# Altium PCB DIOT_SYS_extender_card.PcbDoc (part 4 of 6)
Units mm, origin at the board's own origin, x right, y up, seen from the top; angles counter-clockwise.
Board outline 280.04 x 100 mm, 6 copper layers (Top Layer, L2GND, L3, L4, L5GND, Bottom Layer), stack 1.558 mm thick; 18 components, 344 nets, 1062 pads, 179 vias.
Unrouted connection lines stored in the file: 389.
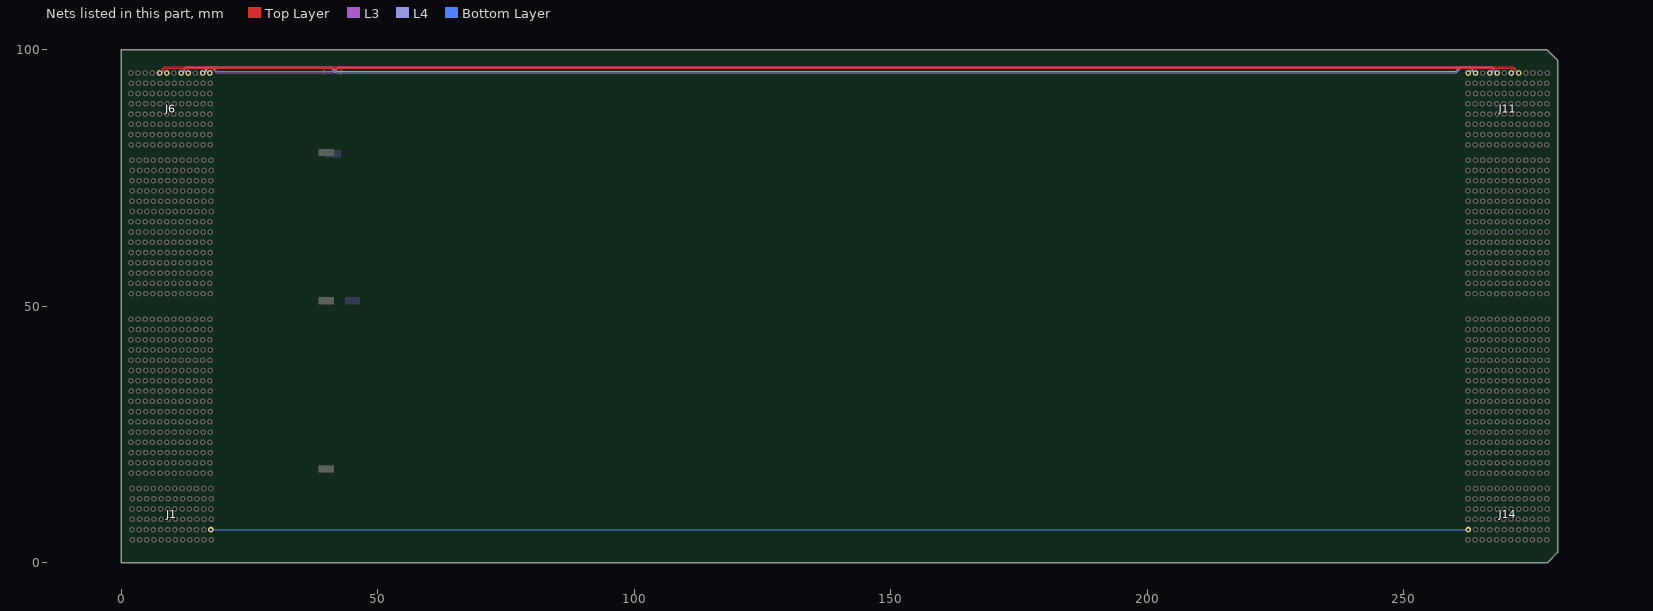
[diagram p8: the nets of this part, all layers, seen from the top]

## Via types
v1: diameter 0.4, hole 0.2, Top Layer to Bottom Layer, tented both sides, 179 vias

## Nets (pads, with @x,y where several pads share a name; then routed paths per layer and width w, separated by ;. In a path a pad name is that pad's centre, name@x,y a point inside that pad or via, vN(x,y) a via of type N, cw(c..) or ccw(c..) an arc to the next point about the centre after c; other vN are vias at no path point) (continued)
SLOT8.LVDS_12_N: J6.F8 J11.F8 | length 265.7
  Top Layer w0.11: J6.F8@8.9,95.5 8.66,95.5 8.32,95.84 8.32,96.186 8.609,96.476 55.039,96.476 271.304,96.476 271.619,96.161 271.619,95.84 271.279,95.5 J11.F8@271.039,95.5
SLOT8.LVDS_12_P: J6.E8 J11.E8 | length 266.5
  Top Layer w0.11: J6.E8@7.5,95.5 7.74,95.5 8.08,95.84 8.08,96.286 8.51,96.716 55.039,96.716 271.403,96.716 271.859,96.26 271.859,95.84 272.199,95.5 J11.E8@272.439,95.5
SLOT8.LVDS_13_N: J6.I8 J11.I8 | length 258.3
  L3 w0.085: J6.I8@13.1,95.5 12.833,95.5 12.523,95.81 12.523,96.345 12.661,96.483 17.65,96.483 18.578,95.555 39.261,95.555 39.397,95.555 39.515,95.438 v1(39.6,95.438) 39.6,95.455 39.7,95.555 41.474,95.555 42.402,96.483 267.192,96.483 267.416,96.259 267.416,95.81 267.106,95.5 J11.I8@266.839,95.5
SLOT8.LVDS_13_P: J6.H8 J11.H8 | length 259.1
  L3 w0.085: J6.H8@11.7,95.5 11.967,95.5 12.278,95.81 12.278,96.446 12.559,96.728 17.751,96.728 18.679,95.8 39.16,95.8 39.397,95.8 39.515,95.918 v1(39.6,95.918) 39.6,95.9 39.7,95.8 41.372,95.8 42.3,96.728 267.294,96.728 267.661,96.361 267.661,95.81 267.971,95.5 J11.H8@268.239,95.5
SLOT8.LVDS_14_N: J6.L8 J11.L8 | length 249.8
  L4 w0.085: J6.L8@17.3,95.5 17.033,95.5 16.723,95.81 16.723,96.206 16.976,96.459 40.951,96.459 41.855,95.555 42.7,95.555 42.8,95.455 v1(42.8,95.438) 42.885,95.438 43.003,95.555 260.245,95.555 261.149,96.459 263.056,96.459 263.216,96.299 263.216,95.81 262.906,95.5 J11.L8@262.639,95.5
SLOT8.LVDS_14_P: J6.K8 J11.K8 | length 250.6
  L4 w0.085: J6.K8@15.9,95.5 16.167,95.5 16.478,95.81 16.478,96.307 16.875,96.704 41.052,96.704 41.957,95.8 42.7,95.8 42.8,95.9 v1(42.8,95.918) 42.885,95.918 43.003,95.8 260.143,95.8 261.048,96.704 263.157,96.704 263.461,96.4 263.461,95.81 263.771,95.5 J11.K8@264.039,95.5
SYSEN_N: J1.L2 J14.L2 | length 245.1
  Bottom Layer w0.085: J1.L2@17.5,6.5 260.125,6.5 J14.L2@262.639,6.5
pads on no net: J2.A1 J2.B1 J2.B2 J2.C2 J2.D1 J2.E1 J2.E2 J2.F2 J2.G1 J2.H1 J2.H2 J2.I2 J2.J1 J2.K1 J2.K2 J2.L2 J3.A4 J3.D4 J3.G4 J3.J4 J33.A1 J33.B1 J33.B2 J33.C2 J33.D1 J33.E1 J33.E2 J33.F2 J33.G1 J33.H1 J33.H2 J33.I2 J33.J1 J33.K1 J33.K2 J33.L2

## Polygon pours and split planes (outlines as drawn)
GND on Bottom Layer "GND_L06_P209" (solid, remove dead copper, pour order 209): 262,52.7 262,46.775 279.775,46.775 279.775,52.7
no net on Bottom Layer "NONET_L06_P203" (solid, pour order 203): 277.533,1 277.55,1 278.79,2.24 60.265,2.24 60.265,1
GND on Top Layer "GND_L01_P207" (solid, remove dead copper, pour order 207): 262,52.7 262,46.775 279.775,46.775 279.775,52.7
no net on Top Layer "esd1" (solid, pour order 189): 277.533,1 277.55,1 278.79,2.24 60.25,2.24 60.25,1
P12V0 on L3 "P12V0_L03_P210" (solid, pour order 210): 1.025,5.95 1.025,2.1 278.5,2.1 278.5,5.875
P12V0 on L4 "P12V0_L04_P211" (solid, pour order 211): 1.025,5.95 1.025,2.1 278.5,2.1 278.5,5.875
GND on L5GND (split plane): 279.037,97.585 279.037,2.415 277.624,1.002 1.002,1.002 1.002,98.998 277.624,98.998
GND on L2GND (split plane): 279.037,97.585 279.037,2.415 277.624,1.002 1.002,1.002 1.002,98.998 277.624,98.998

## Keep-outs
Keep-Out Layer:
  region: 266.037,48.55 279.475,48.55 279.475,51.45 266.037,51.45

## Other copper
Top Layer:
  rectangle net SLOT1.LVDS_3_P: 39.614,10.556 39.99,10.728
  rectangle net SLOT1.LVDS_3_N: 39.69,10.863 39.99,10.976
  rectangle net SERVMOD: 34.573,8.348 34.893,8.468
  rectangle net PRST_N: 34.57,8.602 34.841,8.726
  rectangle net SHARED_BUS_3: 29.478,10.247 29.847,10.468
  rectangle net PE_CLK_N: 34.389,14.253 34.743,14.433
  rectangle net PE_CLK_P: 34.302,14.568 34.703,14.733
  rectangle net SLOT1.LVDS_9_N: 29.597,16.383 29.992,16.551
  rectangle net SLOT1.LVDS_9_P: 29.597,16.686 29.992,16.863
  rectangle net SLOT2.LVDS_9_N: 34.669,21.34 34.945,21.458
  rectangle net SLOT2.LVDS_9_P: 34.617,21.593 34.945,21.763
  rectangle net 3_DIFF_15_P: 39.651,23.787 39.911,23.905
  rectangle net P_PRES0_N: 29.597,25.81 29.88,26.03
  rectangle net F_RST: 34.593,27.593 34.854,27.71
  rectangle net M_SDA: 39.598,29.3 39.89,29.476
  rectangle net M_SCL: 39.615,29.611 39.941,29.85
  rectangle net P_RST: 29.675,31.7 29.992,31.885
  rectangle net SLOT3.LVDS_2_N: 34.572,33.183 34.893,33.342
  rectangle net SLOT3.LVDS_2_P: 34.621,33.477 34.85,33.663
  rectangle net SLOT7.LVDS_2_N: 39.5,35.183 39.99,35.338
  rectangle net SLOT7.LVDS_2_P: 39.615,35.473 39.939,35.663
  rectangle net SLOT3.LVDS_0_N: 29.474,37.16 29.921,37.342
  rectangle net SLOT3.LVDS_0_P: 29.597,37.477 29.992,37.663
  rectangle net SLOT5.LVDS_0_N: 34.617,39.183 34.998,39.348
  rectangle net SLOT5.LVDS_0_P: 34.642,39.483 34.918,39.601
  rectangle net SLOT7.LVDS_0_N: 39.661,41.266 39.89,41.389
  rectangle net SLOT7.LVDS_0_P: 39.615,41.523 39.914,41.718
  rectangle net SLOT2.LVDS_3_N: 29.597,43.229 29.88,43.399
  rectangle net SLOT2.LVDS_3_P: 29.597,43.533 29.868,43.709
  rectangle net SLOT4.LVDS_3_N: 34.669,45.288 34.998,45.408
  rectangle net SLOT4.LVDS_3_P: 34.707,45.543 34.945,45.71
  rectangle net SLOT6.LVDS_3_N: 39.713,47.333 39.927,47.393
  rectangle net SLOT6.LVDS_3_P: 39.63,47.53 39.927,47.59
  rectangle net SLOT3.LVDS_9_N: 39.569,54.473 39.832,54.516
  rectangle net SLOT5.LVDS_5_P: 39.573,60.729 39.739,60.806
  region net SLOT2.LVDS_9_P: 34.918,21.919 34.772,22.094 34.524,21.887 34.67,21.712
  region net 3_DIFF_15_P: 39.899,24.112 39.754,24.287 39.505,24.08 39.651,23.905
  region net SLOT1.LVDS_9_P: 29.909,17.011 29.763,17.186 29.515,16.98 29.661,16.805
  region net PE_CLK_P: 34.696,14.894 34.551,15.069 34.302,14.863 34.448,14.688
  region net SLOT1.LVDS_3_N: 39.939,11.183 39.793,11.358 39.545,11.151 39.69,10.976
  region net PRST_N: 34.819,8.932 34.673,9.107 34.425,8.901 34.57,8.726
  region net F_RST: 34.841,27.917 34.696,28.092 34.447,27.885 34.593,27.71
  region net M_SCL: 39.911,29.938 39.765,30.113 39.517,29.907 39.662,29.731
  region net SLOT3.LVDS_2_P: 34.869,33.805 34.724,33.98 34.475,33.773 34.621,33.598
  region net SLOT7.LVDS_2_P: 39.927,35.797 39.782,35.973 39.533,35.766 39.679,35.591
  region net SLOT3.LVDS_0_P: 29.897,37.803 29.751,37.978 29.503,37.772 29.649,37.597
  region net SLOT5.LVDS_0_P: 34.891,39.808 34.745,39.983 34.497,39.776 34.642,39.601
  region net SLOT7.LVDS_0_P: 39.914,41.849 39.769,42.024 39.52,41.818 39.666,41.642
  region net SLOT2.LVDS_3_P: 29.88,43.859 29.734,44.034 29.486,43.827 29.631,43.652
  region net SLOT4.LVDS_3_P: 35,45.871 34.854,46.046 34.606,45.84 34.752,45.665
  region net SLOT6.LVDS_3_P: 39.99,47.856 39.844,48.031 39.595,47.825 39.741,47.649
  region net SLOT8.LVDS_3_P: 29.868,50.302 29.723,50.478 29.474,50.271 29.62,50.096
  region net SLOT3.LVDS_5_P: 34.893,52.958 34.748,53.133 34.499,52.926 34.645,52.751
  region net SLOT3.LVDS_9_P: 39.874,54.978 39.728,55.153 39.48,54.946 39.625,54.771
  region net SLOT5.LVDS_5_P: 39.872,61.052 39.727,61.228 39.478,61.021 39.624,60.846
  region net SLOT4.LVDS_5_P: 29.873,56.965 29.728,57.14 29.479,56.933 29.625,56.758
  region net SLOT4.LVDS_9_P: 34.869,58.888 34.724,59.063 34.475,58.857 34.621,58.681
  region net SLOT5.LVDS_9_P: 29.955,62.967 29.81,63.142 29.561,62.936 29.707,62.76
  region net SLOT6.LVDS_5_P: 34.894,64.962 34.749,65.137 34.5,64.931 34.646,64.756
  region net SLOT6.LVDS_9_P: 39.888,66.968 39.743,67.143 39.494,66.936 39.64,66.761
  region net SLOT7.LVDS_5_P: 29.952,69.073 29.806,69.249 29.558,69.042 29.703,68.867
  region net SLOT7.LVDS_9_P: 34.953,70.982 34.808,71.158 34.559,70.951 34.705,70.776
  region net SLOT8.LVDS_5_P: 39.977,72.963 39.832,73.138 39.583,72.932 39.729,72.756
  region net 2_SERVMOD: 34.952,76.874 34.806,77.049 34.558,76.842 34.703,76.667
  region net 3_PE_CLK_P: 39.863,78.052 39.717,78.228 39.469,78.021 39.615,77.846
  region net SLOT8.LVDS_9_P: 29.966,74.962 29.82,75.137 29.572,74.93 29.717,74.755
  region net 7_PE_CLK_P: 29.943,79.226 29.798,79.402 29.549,79.195 29.695,79.02
  region net SLOT1.LVDS_13_P: 34.845,81.244 34.699,81.419 34.45,81.212 34.596,81.037
  region net SLOT2.LVDS_13_P: 39.967,83.853 39.821,84.028 39.573,83.821 39.718,83.646
  region net SLOT3.LVDS_13_P: 29.843,85.971 29.698,86.146 29.449,85.939 29.595,85.764
  region net SLOT4.LVDS_13_P: 34.856,87.869 34.71,88.044 34.462,87.837 34.607,87.662
  region net SLOT5.LVDS_13_P: 39.872,89.97 39.727,90.145 39.478,89.938 39.624,89.763
  region net SLOT6.LVDS_13_P: 29.862,91.861 29.717,92.036 29.468,91.829 29.614,91.654
  region net SLOT7.LVDS_13_P: 34.974,93.875 34.829,94.05 34.58,93.844 34.726,93.669
  region net SLOT8.LVDS_13_P: 39.888,96.074 39.742,96.249 39.494,96.043 39.639,95.868
  region net SERVMOD: 34.676,7.967 34.821,8.142 34.573,8.348 34.427,8.173
  region net SHARED_BUS_3: 29.651,9.966 29.797,10.141 29.549,10.347 29.403,10.172
  region net SLOT1.LVDS_3_P: 39.796,10.231 39.941,10.406 39.693,10.613 39.547,10.438
  region net PE_CLK_N: 34.551,13.932 34.697,14.107 34.448,14.314 34.303,14.138
  region net SLOT1.LVDS_9_N: 29.762,16.052 29.908,16.227 29.66,16.433 29.514,16.258
  region net SLOT2.LVDS_9_N: 34.772,20.958 34.917,21.133 34.669,21.34 34.523,21.165
  region net 3_DIFF_15_N: 39.76,23.15 39.905,23.325 39.657,23.531 39.511,23.356
  region net P_PRES0_N: 29.775,25.53 29.921,25.705 29.673,25.912 29.527,25.737
  region net P_PRES1_N: 34.703,26.959 34.848,27.134 34.6,27.341 34.454,27.166
  region net M_SDA: 39.761,28.977 39.907,29.152 39.658,29.359 39.513,29.184
  region net P_RST: 29.847,31.379 29.992,31.554 29.744,31.76 29.598,31.585
  region net SLOT3.LVDS_2_N: 34.72,32.845 34.866,33.02 34.618,33.226 34.472,33.051
  region net SLOT7.LVDS_2_N: 39.786,34.838 39.932,35.013 39.683,35.22 39.538,35.045
  region net SLOT3.LVDS_0_N: 29.754,36.845 29.9,37.02 29.652,37.227 29.506,37.051
  region net SLOT5.LVDS_0_N: 34.748,38.85 34.893,39.025 34.645,39.232 34.499,39.057
  region net SLOT7.LVDS_0_N: 39.764,40.885 39.91,41.06 39.661,41.266 39.516,41.091
  region net SLOT2.LVDS_3_N: 29.739,42.898 29.885,43.073 29.637,43.28 29.491,43.105
  region net SLOT4.LVDS_3_N: 34.852,44.907 34.998,45.082 34.749,45.288 34.603,45.113
  region net SLOT6.LVDS_3_N: 39.844,46.897 39.99,47.072 39.742,47.279 39.596,47.104
  region net SLOT8.LVDS_3_N: 29.724,49.345 29.87,49.52 29.621,49.727 29.476,49.552
  region net SLOT3.LVDS_5_N: 34.746,52.001 34.892,52.176 34.644,52.383 34.498,52.208
  region net SLOT3.LVDS_9_N: 39.735,54.017 39.881,54.193 39.632,54.399 39.487,54.224
  region net SLOT4.LVDS_5_N: 29.728,56.007 29.873,56.182 29.625,56.389 29.479,56.213
  region net SLOT4.LVDS_9_N: 34.726,57.933 34.871,58.108 34.623,58.314 34.477,58.139
  region net SLOT5.LVDS_9_N: 29.815,62.008 29.961,62.183 29.712,62.39 29.567,62.214
  region net SLOT6.LVDS_5_N: 34.749,64.003 34.895,64.179 34.646,64.385 34.501,64.21
  region net SLOT6.LVDS_9_N: 39.745,66.005 39.89,66.181 39.642,66.387 39.496,66.212
  region net SLOT8.LVDS_5_N: 39.835,72.009 39.981,72.184 39.732,72.391 39.587,72.216
  region net SLOT7.LVDS_5_N: 29.803,68.116 29.948,68.291 29.7,68.498 29.554,68.322
  region net SLOT7.LVDS_9_N: 34.8,70.023 34.945,70.198 34.697,70.405 34.551,70.229
  region net SLOT8.LVDS_9_N: 29.819,74.007 29.964,74.182 29.716,74.389 29.57,74.214
  region net 2_SERVMOD: 34.801,76.545 34.947,76.72 34.699,76.927 34.553,76.752
  region net 7_PE_CLK_N: 29.795,78.272 29.94,78.447 29.692,78.653 29.546,78.478
  region net SLOT1.LVDS_13_N: 34.706,80.282 34.852,80.457 34.603,80.664 34.457,80.489
  region net SLOT2.LVDS_13_N: 39.821,82.895 39.967,83.071 39.718,83.277 39.572,83.102
  region net SLOT3.LVDS_13_N: 29.702,85.01 29.847,85.185 29.599,85.391 29.453,85.216
  region net SLOT4.LVDS_13_N: 34.713,86.913 34.859,87.088 34.611,87.295 34.465,87.119
  region net SLOT5.LVDS_13_N: 39.728,89.008 39.874,89.184 39.626,89.39 39.48,89.215
  region net SLOT6.LVDS_13_N: 29.714,90.908 29.859,91.084 29.611,91.29 29.465,91.115
  region net SLOT7.LVDS_13_N: 34.826,92.913 34.972,93.088 34.723,93.295 34.578,93.12
  region net SLOT8.LVDS_13_N: 39.737,95.117 39.883,95.293 39.634,95.499 39.489,95.324
  rectangle net SHARED_BUS_0: 49.673,5.946 50.273,6.446
  rectangle net LVDS15_P: 54.698,8.186 55.298,8.686
  rectangle net LVDS15_N: 54.698,7.551 55.298,8.051
  rectangle net SLOT1.LVDS_1_P: 44.701,10.546 45.301,11.046
  rectangle net SLOT1.LVDS_1_N: 44.701,9.911 45.301,10.411
  rectangle net SLOT1.LVDS_2_P: 49.665,13.061 50.265,13.561
  rectangle net SLOT1.LVDS_2_N: 49.665,12.426 50.265,12.926
  rectangle net MGT1_Tx_P: 54.663,15.492 55.263,15.992
  rectangle net MGT1_Tx_N: 54.663,14.857 55.263,15.357
  rectangle net SLOT1.LVDS_8_P: 44.699,18.136 45.299,18.636
  rectangle net SLOT1.LVDS_8_N: 44.699,17.501 45.299,18.001
  rectangle net SLOT2.LVDS_5_N: 49.699,20.571 50.299,21.071
  rectangle net SLOT2.LVDS_5_P: 49.699,19.936 50.299,20.436
  rectangle net SLOT2.LVDS_8_N: 54.671,22.586 55.271,23.086
  rectangle net SLOT2.LVDS_8_P: 54.671,21.951 55.271,22.451
  rectangle net 2_DIFF_15_N: 44.699,24.544 45.299,25.044
  rectangle net 2_DIFF_15_P: 44.699,23.909 45.299,24.409
  rectangle net 6_DIFF_15_N: 49.702,26.561 50.302,27.061
  rectangle net 6_DIFF_15_P: 49.702,25.926 50.302,26.426
  rectangle net 7_DIFF_15_P: 54.72,28.586 55.32,29.086
  rectangle net 7_DIFF_15_N: 54.72,27.951 55.32,28.451
  rectangle net SLOT2.LVDS_2_N: 44.699,30.565 45.299,31.065
  rectangle net SLOT2.LVDS_2_P: 44.699,29.93 45.299,30.43
  rectangle net SLOT6.LVDS_2_N: 49.699,32.553 50.299,33.053
  rectangle net SLOT6.LVDS_2_P: 49.699,31.918 50.299,32.418
  rectangle net SLOT2.LVDS_1_N: 54.74,34.575 55.34,35.075
  rectangle net SLOT2.LVDS_1_P: 54.74,33.94 55.34,34.44
  rectangle net SLOT4.LVDS_1_N: 44.699,36.546 45.299,37.046
  rectangle net SLOT4.LVDS_1_P: 44.699,35.911 45.299,36.411
  rectangle net SLOT6.LVDS_1_N: 49.702,38.546 50.302,39.046
  rectangle net SLOT6.LVDS_1_P: 49.702,37.911 50.302,38.411
  rectangle net SLOT8.LVDS_1_N: 54.72,40.571 55.32,41.071
  rectangle net SLOT8.LVDS_1_P: 54.72,39.936 55.32,40.436
  rectangle net SLOT3.LVDS_4_N: 44.705,42.549 45.305,43.049
  rectangle net SLOT3.LVDS_4_P: 44.705,41.914 45.305,42.414
  rectangle net SLOT5.LVDS_4_N: 49.702,44.546 50.302,45.046
  rectangle net SLOT5.LVDS_4_P: 49.702,43.911 50.302,44.411
  rectangle net SLOT7.LVDS_4_N: 54.712,46.5 55.312,47
  rectangle net SLOT7.LVDS_4_P: 54.712,45.865 55.312,46.365
  rectangle net PRST_N: 34.669,8.602 35.269,9.102
  rectangle net SERVMOD: 34.669,7.968 35.269,8.468
  rectangle net SLOT1.LVDS_3_P: 39.794,10.228 40.394,10.728
  rectangle net SLOT1.LVDS_3_N: 39.794,10.863 40.394,11.363
  rectangle net PE_CLK_N: 34.549,13.933 35.149,14.433
  rectangle net PE_CLK_P: 34.549,14.568 35.149,15.068
  rectangle net P5V0_MP: 29.755,5.691 30.355,6.191
  rectangle net SHARED_BUS_3: 29.651,9.968 30.251,10.468
  rectangle net SLOT1.LVDS_9_P: 29.76,16.686 30.36,17.186
  rectangle net SLOT1.LVDS_9_N: 29.76,16.051 30.36,16.551
  rectangle net SLOT2.LVDS_9_P: 34.769,21.593 35.369,22.093
  rectangle net SLOT2.LVDS_9_N: 34.769,20.958 35.369,21.458
  rectangle net 3_DIFF_15_P: 39.756,23.787 40.356,24.287
  rectangle net 3_DIFF_15_N: 39.756,23.152 40.356,23.652
  rectangle net P_PRES0_N: 29.773,25.53 30.373,26.03
  rectangle net F_RST: 34.699,27.593 35.299,28.093
  rectangle net P_PRES1_N: 34.699,26.959 35.299,27.459
  rectangle net M_SCL: 39.759,29.611 40.359,30.111
  rectangle net M_SDA: 39.759,28.976 40.359,29.476
  rectangle net P_RST: 29.847,31.385 30.447,31.885
  rectangle net SLOT3.LVDS_2_P: 34.72,33.477 35.32,33.977
  rectangle net SLOT3.LVDS_2_N: 34.72,32.842 35.32,33.342
  rectangle net SLOT7.LVDS_2_P: 39.778,35.473 40.378,35.973
  rectangle net SLOT7.LVDS_2_N: 39.778,34.838 40.378,35.338
  rectangle net SLOT3.LVDS_0_P: 29.748,37.477 30.348,37.977
  rectangle net SLOT3.LVDS_0_N: 29.748,36.842 30.348,37.342
  rectangle net SLOT5.LVDS_0_P: 34.743,39.483 35.343,39.983
  rectangle net SLOT5.LVDS_0_N: 34.743,38.848 35.343,39.348
  rectangle net SLOT7.LVDS_0_P: 39.767,41.523 40.367,42.023
  rectangle net SLOT7.LVDS_0_N: 39.767,40.889 40.367,41.389
  rectangle net SLOT2.LVDS_3_P: 29.735,43.533 30.335,44.033
  rectangle net SLOT2.LVDS_3_N: 29.735,42.899 30.335,43.399
  rectangle net SLOT4.LVDS_3_P: 34.85,45.543 35.45,46.043
  rectangle net SLOT4.LVDS_3_N: 34.85,44.908 35.45,45.408
  rectangle net SLOT6.LVDS_3_P: 39.838,47.529 40.438,48.029
  rectangle net SLOT6.LVDS_3_N: 39.838,46.894 40.438,47.394
  rectangle net SLOT8.LVDS_3_P: 29.721,49.979 30.321,50.479
  rectangle net SLOT8.LVDS_3_N: 29.721,49.344 30.321,49.844
  rectangle net SLOT3.LVDS_5_P: 34.746,52.634 35.346,53.134
  rectangle net SLOT3.LVDS_5_N: 34.746,51.999 35.346,52.499
  rectangle net SLOT3.LVDS_9_P: 39.729,54.651 40.329,55.151
  rectangle net SLOT3.LVDS_9_N: 39.729,54.017 40.329,54.517
  rectangle net SLOT4.LVDS_5_P: 29.726,56.641 30.326,57.141
  rectangle net SLOT4.LVDS_5_N: 29.726,56.006 30.326,56.506
  rectangle net SLOT4.LVDS_9_P: 34.723,58.564 35.323,59.064
  rectangle net SLOT4.LVDS_9_N: 34.723,57.929 35.323,58.429
  rectangle net SLOT5.LVDS_5_P: 39.728,60.728 40.328,61.228
  rectangle net SLOT5.LVDS_5_N: 39.728,60.093 40.328,60.593
  rectangle net SLOT5.LVDS_9_P: 29.81,62.645 30.41,63.145
  rectangle net SLOT5.LVDS_9_N: 29.81,62.01 30.41,62.51
  rectangle net SLOT6.LVDS_5_P: 34.749,64.637 35.349,65.137
  rectangle net SLOT6.LVDS_5_N: 34.749,64.002 35.349,64.502
  rectangle net SLOT6.LVDS_9_P: 39.742,66.643 40.342,67.143
  rectangle net SLOT6.LVDS_9_N: 39.742,66.008 40.342,66.508
  rectangle net SLOT7.LVDS_5_P: 29.802,68.749 30.402,69.249
  rectangle net SLOT7.LVDS_5_N: 29.802,68.114 30.402,68.614
  rectangle net SLOT7.LVDS_9_P: 34.791,70.661 35.391,71.161
  rectangle net SLOT7.LVDS_9_N: 34.791,70.026 35.391,70.526
  rectangle net SLOT8.LVDS_5_P: 39.832,72.645 40.432,73.145
  rectangle net SLOT8.LVDS_5_N: 39.832,72.01 40.432,72.51
  rectangle net SLOT8.LVDS_9_P: 29.819,74.639 30.419,75.139
  rectangle net SLOT8.LVDS_9_N: 29.819,74.005 30.419,74.505
  rectangle net 2_SERVMOD: 34.798,76.549 35.398,77.049
  rectangle net 3_PE_CLK_P: 39.714,77.732 40.314,78.232
  rectangle net 3_PE_CLK_N: 39.714,77.097 40.314,77.597
  rectangle net 7_PE_CLK_P: 29.792,78.907 30.392,79.407
  rectangle net 7_PE_CLK_N: 29.792,78.272 30.392,78.772
  rectangle net SLOT1.LVDS_13_P: 34.699,80.919 35.299,81.419
  rectangle net SLOT1.LVDS_13_N: 34.699,80.284 35.299,80.784
  rectangle net SLOT2.LVDS_13_P: 39.82,83.53 40.42,84.03
  rectangle net SLOT2.LVDS_13_N: 39.82,82.895 40.42,83.395
  rectangle net SLOT3.LVDS_13_P: 29.696,85.646 30.296,86.146
  rectangle net SLOT3.LVDS_13_N: 29.696,85.011 30.296,85.511
  rectangle net SLOT4.LVDS_13_P: 34.71,87.546 35.31,88.046
  rectangle net SLOT4.LVDS_13_N: 34.71,86.912 35.31,87.412
  rectangle net SLOT5.LVDS_13_P: 39.728,89.645 40.328,90.145
  rectangle net SLOT5.LVDS_13_N: 39.728,89.01 40.328,89.51
  rectangle net SLOT6.LVDS_13_P: 29.714,91.537 30.314,92.037
  rectangle net SLOT6.LVDS_13_N: 29.714,90.902 30.314,91.402
  rectangle net SLOT7.LVDS_13_P: 34.823,93.548 35.423,94.048
  rectangle net SLOT7.LVDS_13_N: 34.823,92.914 35.423,93.414
  rectangle net SLOT8.LVDS_13_P: 39.738,95.749 40.338,96.249
  rectangle net SLOT8.LVDS_13_N: 39.738,95.114 40.338,95.614
  rectangle net MGT3_Tx_N: 49.699,52.929 50.299,53.429
  rectangle net MGT3_Tx_P: 49.699,53.563 50.299,54.063
  rectangle net SLOT3.LVDS_7_N: 54.698,54.916 55.298,55.416
  rectangle net SLOT3.LVDS_7_P: 54.698,55.551 55.298,56.051
  rectangle net MGT4_Tx_N: 44.699,56.951 45.299,57.451
  rectangle net MGT4_Tx_P: 44.699,57.586 45.299,58.086
  rectangle net SLOT4.LVDS_8_N: 49.699,58.916 50.299,59.416
  rectangle net SLOT4.LVDS_8_P: 49.699,59.551 50.299,60.051
  rectangle net MGT5_Tx_N: 54.698,60.922 55.298,61.422
  rectangle net MGT5_Tx_P: 54.698,61.557 55.298,62.057
  rectangle net SLOT5.LVDS_7_N: 44.699,62.923 45.299,63.423
  rectangle net SLOT5.LVDS_7_P: 44.699,63.557 45.299,64.057
  rectangle net MGT6_Tx_N: 49.699,64.946 50.299,65.446
  rectangle net MGT6_Tx_P: 49.699,65.581 50.299,66.081
  rectangle net SLOT6.LVDS_7_N: 54.698,66.911 55.298,67.411
  rectangle net SLOT6.LVDS_7_P: 54.698,67.546 55.298,68.046
  rectangle net MGT7_Tx_N: 44.699,69.017 45.299,69.517
  rectangle net MGT7_Tx_P: 44.699,69.652 45.299,70.152
  rectangle net SLOT7.LVDS_7_N: 49.699,70.921 50.299,71.421
  rectangle net SLOT7.LVDS_7_P: 49.699,71.556 50.299,72.056
  rectangle net MGT8_Tx_N: 54.698,72.931 55.298,73.431
  rectangle net MGT8_Tx_P: 54.698,73.565 55.298,74.065
  rectangle net SLOT8.LVDS_8_N: 44.699,75.001 45.299,75.501
  rectangle net SLOT8.LVDS_8_P: 44.699,75.636 45.299,76.136
  rectangle net 2_PE_CLK_N: 49.699,76.952 50.299,77.452
  rectangle net 2_PE_CLK_P: 49.699,77.587 50.299,78.087
  rectangle net 6_PE_CLK_N: 44.699,79.883 45.299,80.383
  rectangle net 6_PE_CLK_P: 44.699,80.518 45.299,81.018
  rectangle net 7_SERVMOD: 54.726,78.813 55.326,79.313
  rectangle net SLOT3.LVDS_12_P: 44.72,86.611 45.32,87.111
  rectangle net SLOT3.LVDS_12_N: 44.72,85.976 45.32,86.476
  rectangle net SLOT4.LVDS_12_P: 49.699,88.566 50.299,89.066
  rectangle net SLOT4.LVDS_12_N: 49.699,87.931 50.299,88.431
  rectangle net SLOT5.LVDS_12_P: 54.698,90.59 55.298,91.09
  rectangle net SLOT5.LVDS_12_N: 54.698,89.955 55.298,90.455
  rectangle net SLOT1.LVDS_12_N: 49.699,81.93 50.299,82.43
  rectangle net SLOT1.LVDS_12_P: 49.699,82.565 50.299,83.065
  rectangle net SLOT2.LVDS_12_N: 54.698,83.942 55.298,84.442
  rectangle net SLOT2.LVDS_12_P: 54.698,84.577 55.298,85.077
  rectangle net SLOT6.LVDS_12_N: 44.699,91.909 45.299,92.409
  rectangle net SLOT6.LVDS_12_P: 44.699,92.543 45.299,93.043
  rectangle net SLOT7.LVDS_12_N: 49.699,94.001 50.299,94.501
  rectangle net SLOT7.LVDS_12_P: 49.699,94.636 50.299,95.136
  rectangle net SLOT8.LVDS_12_N: 54.739,96.026 55.339,96.526
  rectangle net SLOT8.LVDS_12_P: 54.739,96.661 55.339,97.161
  text ".Layer_Name" at 142.5,-42 h1.91 r90
  text "1" at 141.4,-46.355 h2.54
L3:
  text "Signal" at 153.385,-41.65 h1.9 r90
  text "3" at 151.56,-46.355 h2.54
L4:
  text "Signal" at 158.43,-41.55 h1.9 r90
  text "4" at 156.575,-46.325 h2.54